# EAGLE board Pi4MotorShield (EAGLE 7.5.0)
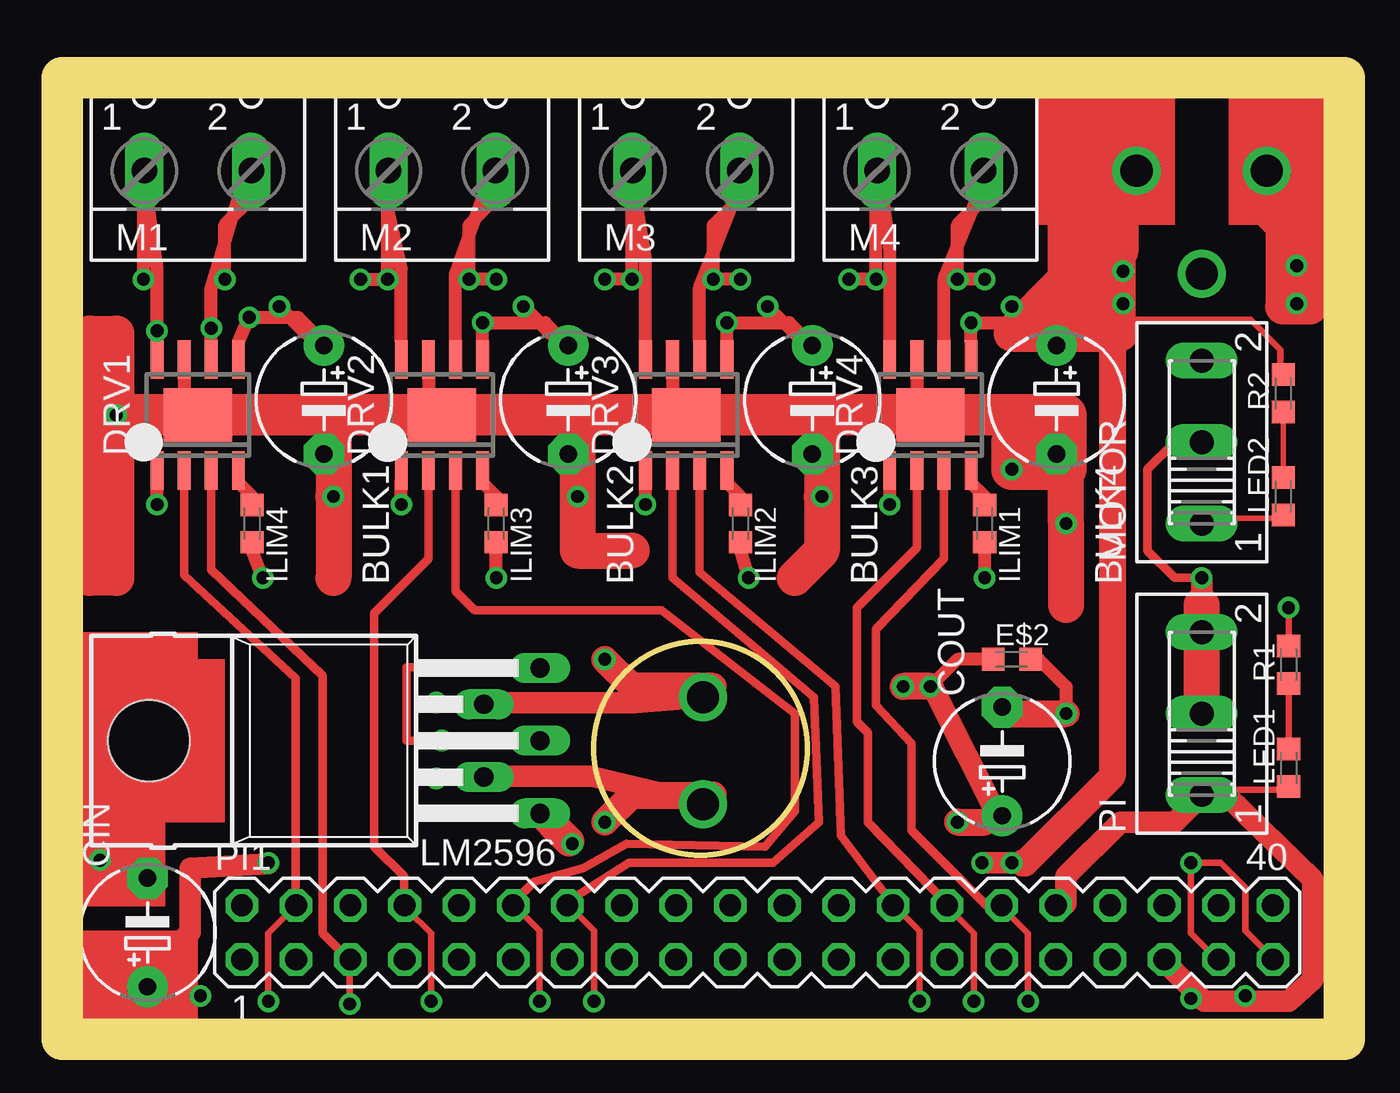
[diagram p0: board, top side]
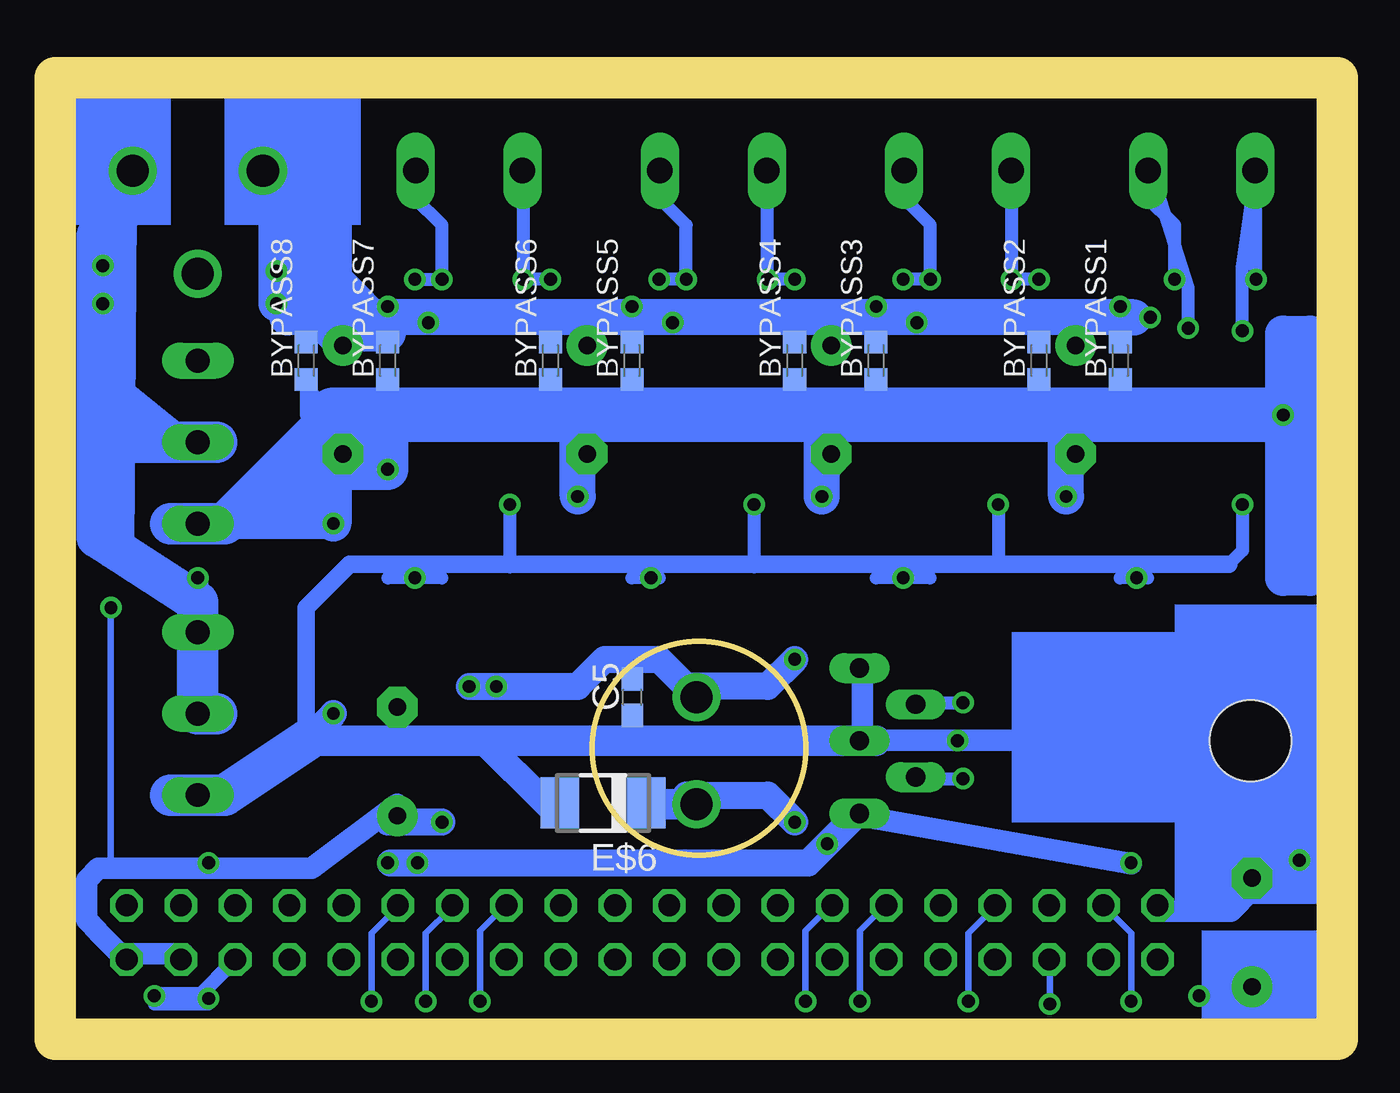
[diagram p1: board, bottom side, seen from below]

Size 60 x 45 mm. Coordinates in mm from the lower left corner, seen from the top.
Outline: 0,0 60,0 60,45 0,45 0,0
Outline: circle at 29.87,13.62 radius 5
Copper layers (1*16): Top 0.035mm / dielectric 1.5mm / Bottom 0.035mm
Design rules "default": minimum track width 10mil, minimum drill 24mil, track to track 8mil, track to pad 8mil, pad to pad 8mil, via to via 8mil, smd to smd 8mil, copper to edge 40mil, drill to drill 8mil, minimum pad ring 10mil, minimum via ring 8mil, stop-mask expansion 4mil, vias tented up to drill 0mil, thermal gap 10mil

## Footprints (pad centres in the part's own frame; a part is rotated, then mirrored left to right if it is on the bottom)
E5-6 = drill 0.813 pad 1.905: + -2.54,0 | drill 0.813 pad 1.905 octagon: - 2.54,0
C0603K = smd 1.05 x 1.08: 1 -0.875,0; 2 0.875,0
C0603 = smd 1.1 x 1: 1 -0.85,0; 2 0.85,0
HSOP8 = smd 0.6 x 1.8: 1 -1.905,-2.6; 2 -0.635,-2.6; 3 0.635,-2.6; 4 1.905,-2.6; 5 1.905,2.6; 6 0.635,2.6; 7 -0.635,2.6; 8 -1.905,2.6 | smd 3.2 x 2.51: EXP 0,0
DO-214AC = smd 1.8 x 2.4: A 2.025,0; C -2.025,0
TO220-52 = drill 0.9 long: 1 -3.4,-21.1; 2 -1.7,-18.47; 3 0,-21.1; 4 1.7,-18.47; 5 3.4,-21.1 | hole 3.8: 0,-2.8
W237-102 = drill 1.194 long: 1 -2.5,-1.27; 2 2.5,-1.27
255SB = drill 1.118 long: 1 -3.81,0; 2 0,0; 3 3.81,0
MA20-2 = drill 1.016 octagon: 1 -24.13,-1.27; 2 -24.13,1.27; 3 -21.59,-1.27; 4 -21.59,1.27; 5 -19.05,-1.27; 6 -19.05,1.27; 7 -16.51,-1.27; 8 -16.51,1.27; 9 -13.97,-1.27; 10 -13.97,1.27; 11 -11.43,-1.27; 12 -11.43,1.27; 13 -8.89,-1.27; 14 -8.89,1.27; 15 -6.35,-1.27; 16 -6.35,1.27; 17 -3.81,-1.27; 18 -3.81,1.27; 19 -1.27,-1.27; 20 -1.27,1.27; 21 1.27,-1.27; 22 1.27,1.27; 23 3.81,-1.27; 24 3.81,1.27; 25 6.35,-1.27; 26 6.35,1.27; 27 8.89,-1.27; 28 8.89,1.27; 29 11.43,-1.27; 30 11.43,1.27; 31 13.97,-1.27; 32 13.97,1.27; 33 16.51,-1.27; 34 16.51,1.27; 35 19.05,-1.27; 36 19.05,1.27; 37 21.59,-1.27; 38 21.59,1.27; 39 24.13,-1.27; 40 24.13,1.27

## Placement (x,y rotation side)
BULK1  470uF  [E5-6]  12.26,29.93 270 top
BULK2  470uF  [E5-6]  23.69,29.93 270 top
BULK3  470uF  [E5-6]  35.12,29.93 270 top
BULK4  470uF  [E5-6]  46.55,29.93 270 top
BYPASS1  .1uF  [C0603K]  10.16,31.75 90 bottom
BYPASS2  .1uF  [C0603K]  13.97,31.75 90 bottom
BYPASS3  .1uF  [C0603K]  21.59,31.75 90 bottom
BYPASS4  .1uF  [C0603K]  25.4,31.75 90 bottom
BYPASS5  .1uF  [C0603K]  33.02,31.75 90 bottom
BYPASS6  .1uF  [C0603K]  36.83,31.75 90 bottom
BYPASS7  .1uF  [C0603K]  44.45,31.75 90 bottom
BYPASS8  .1uF  [C0603K]  48.26,31.75 90 bottom
C5  [C0603]  33,16 90 bottom
CIN  470uF  [E5-6]  4,5 90 top
COUT  220uF  [E5-6]  44,13 90 top
DRV1  [HSOP8]  6.35,29.21 0 top
DRV2  [HSOP8]  17.78,29.21 0 top
DRV3  [HSOP8]  29.21,29.21 0 top
DRV4  [HSOP8]  40.64,29.21 0 top
E$2  [C0603K]  44.45,17.78 0 top
E$6  [DO-214AC]  34.37,11.06 180 bottom
ILIM1  [C0603K]  43.18,24.13 270 top
ILIM2  [C0603K]  31.75,24.13 270 top
ILIM3  [C0603K]  20.32,24.13 270 top
ILIM4  [C0603K]  8.89,24.13 270 top
LED1  [C0603K]  57.4,12.7 90 top
LED2  [C0603K]  57.15,25.4 90 top
LM2596  [TO220-52]  1.27,13.97 90 top
M1  [W237-102]  6.35,41.91 0 top
M2  [W237-102]  17.78,41.91 0 top
M3  [W237-102]  29.21,41.91 0 top
M4  [W237-102]  40.64,41.91 0 top
MOTOR  [255SB]  53.34,27.94 90 top
PI  [255SB]  53.34,15.24 90 top
PI1  [MA20-2]  32.54,5 0 top
R1  [C0603K]  57.4,17.53 90 top
R2  [C0603K]  57.15,30.23 90 top

## Library data of the parts
BULK1-BULK4 CIN COUT = rcl
BYPASS1-BYPASS8 E$2 ILIM1-ILIM4 = ref-packages
C5 = eagle-ltspice
DRV1-DRV4 = st-microelectronics
E$6 = diode
LED1 LED2 R1 R2 = ref-packages-longpad
LM2596 = linear
M1-M4 = con-wago-500
MOTOR PI = switch
PI1 = con-lstb

## Nets
S$7: PI.2
S$64: PI.1

## Tracks (layer width: path | path; a pad name or v marks a point on that pad's centre or on a via)
S$1
  Top 0.305: 57.02,31.24 57.02,32.26 55.63,33.66 49.66,33.66
S$2
  Top 0.254: 57.15,29.34 57.15,26.29
S$3
  Top 0.254: 57.02,24.38 54.48,24.38
S$4
  Top 1.27: 49.15,32.51 49.15,12.32 45.09,8.26 44.96,8.26
S$5
  Top 0.254: 57.4,16.64 57.4,16.38 | 57.4,13.84 57.4,13.59
  Top 0.305: 57.4,13.84 57.4,16.38
S$6
  Top 0.254: 57.28,11.68 54.74,11.68
  Top 0.305: 54.36,11.68 57.28,11.68
S$7  (via drill 0.6, 1, 1.5)
  Top 0.406: 52.07,27.94 50.8,26.67 50.8,22.86 52.07,21.59 v53.34,21.59
  Top 1.016: v53.34,21.59 53.34,20.32
  Top 1.676: PI.2 53.34,20.32
  Bottom 1.016: 53.34,20.32 53.34,20.45 v53.34,21.59
  Bottom 1.676: PI.2 53.34,20.32
  Bottom 1.93: v56.39,40.64 56.39,39.24 58.04,37.59 58.04,30.73 | 58.04,30.73 54.74,28.07 | 58.04,30.73 58.04,23.5 53.34,20.45 PI.2 52.45,15.24
S$8
  Bottom 1.93: 52.45,27.94 53.34,27.94 54.74,27.94 56.77,27.94
S$9
  Bottom 1.93: 57.15,38.73 57.28,22.99
S$10  (via drill 0.6)
  Top 1.676: 12.7,29.21 v12.7,25.4 12.7,21.59 | 24.13,29.21 v24.13,25.4 24.13,22.86 26.67,22.86 | 35.56,29.21 v35.56,25.4 35.56,22.86 34.29,21.59 | 46.99,27.94 v46.99,24.13 46.99,20.32
  Top 1.93: v2.54,29.21 12.7,29.21 24.13,29.21 35.56,29.21 46.99,29.21 46.99,27.94 46.99,26.67 v44.45,26.67 44.45,27.94 45.72,27.94
  Bottom 0.61: 48.26,29.21 48.26,30.48 46.99,29.21 | 46.99,25.4 46.99,26.67
  Bottom 1.422: v46.99,24.13 48.26,24.13 | 49.53,24.13 50.8,24.13 | 52.07,24.13 50.8,24.13 | 50.8,24.13 46.99,27.94 46.99,26.67 49.53,24.13 | 49.53,24.13 48.26,24.13 | 48.26,24.13 46.99,25.4
  Bottom 1.676: 46.99,27.94 46.99,25.4 v46.99,24.13 | v24.13,25.4 24.13,27.94 | v35.56,25.4 35.56,27.94 | v12.7,25.4 12.7,27.94
  Bottom 1.93: 54.61,24.13 52.07,24.13 46.99,29.21 | 44.45,27.94 v44.45,26.67 46.99,26.67 45.72,27.94
  Bottom 2.54: 46.99,29.21 v2.54,29.21
S$11
  Top 0.406: 41.4,6.35 37.72,10.16 37.72,14.35 37.21,14.86 37.21,20.19 40.01,22.99 40.01,25.78
S$12  (via drill 0.6)
  Top 0.61: v44.45,34.29 45.72,33.02
  Top 1.422: 49.53,39.37 49.53,33.02
  Top 1.676: 49.53,40.64 49.53,36.83 45.72,33.02 | 45.72,33.02 49.53,33.02 48.26,34.29 | 45.72,33.02 44.45,33.02 46.99,35.56 46.99,39.37 50.8,43.18 50.8,41.91 48.26,39.37 48.26,36.83
S$13
  Bottom 1.016: 22.23,13.84 22.23,17.27
S$14  (via drill 1.5)
  other vias: 30,11
S$15
  Top 1.016: 40.67,16.64 44,10
S$16
  Top 1.016: 19.81,12.32 24.77,12.32 30.04,11.05
S$17
  Bottom 1.016: 44,14 44,16
S$18
  Top 1.016: 20.7,15.75 26.78,15.75 30.04,16
S$19
  Bottom 1.422: 31,11 32,11
S$20
  Bottom 1.27: 37,11 40,14
S$21
  Top 1.016: 4,3 6,5 6,8 9.65,8.22
S$22
  Bottom 1.016: 4,8 4,13 5,14 21,14
S$23
  Top 1.016: 4,8 4,13 5,14
S$24
  Bottom 1.016: 22.64,10.51 9.65,8.22
S$25
  Top 1.016: 51.56,3.68 53.47,1.78 57.4,1.78 58.55,2.79 58.55,7.49 54.48,11.43
S$26
  Bottom 1.016: 8,6 5,6 4,7
S$27
  Bottom 1.016: 54,4 57,4 58,5 58,5.04 58.55,5.59 58.55,7.45 58,8 48,8 44,11
S$28
  Top 0.61: 8.89,25.4 8.26,26.04
S$29  (via drill 0.6)
  Top 0.61: v15.88,25.02 15.88,26.16
S$30  (via drill 0.6)
  Top 0.61: v27.3,25.02 27.3,26.04
  Bottom 0.61: v27.3,25.02 27.3,22.1
S$31  (via drill 0.6)
  Top 0.61: v38.73,25.02 38.73,25.91
S$32
  Bottom 1.676: 50.8,41.91 50.8,43.18 46.99,39.37 46.99,35.56 44.45,33.02 46.99,33.02 48.26,34.29 48.26,35.56 | 48.26,39.37 48.26,35.56 | 48.26,35.56 46.99,34.29 46.99,38.1 49.53,40.64
S$33
  Top 0.61: 20.32,25.4 19.68,26.04
S$34
  Top 0.61: 31.75,25.27 31.75,25.4 31.11,26.04
S$35
  Top 0.61: 43.18,25.27 43.18,25.4 42.55,26.04
S$36  (via drill 0.6)
  Top 0.61: v32.13,21.59 31.75,22.86
S$37  (via drill 0.6)
  Top 0.61: v43.18,21.59 43.18,22.86
S$38  (via drill 0.6)
  Top 0.61: v20.32,21.59 20.32,22.86
S$39  (via drill 0.6)
  Top 0.61: v9.4,21.59 8.89,22.86
S$40
  Top 1.422: 23.73,9.27 23,10 23,10.02 22.61,10.41
S$41
  Bottom 0.61: 8.89,21.59 10.16,21.59
S$42  (via drill 0.6)
  Top 1.016: 43.18,8.26 v44.45,8.26
S$43  (via drill 0.6)
  other vias: 43.05,8.26
S$44  (via drill 0.6)
  other vias: 23.88,9.14
S$45
  Bottom 1.27: 44.32,8.26 24.77,8.26 22.48,10.54
S$46
  Top 0.305: 38.86,6.22 38.99,6.22 40.13,5.08 40.13,1.91
S$47  (via drill 1.5)
  Bottom 0.406: 31,17 v30,16
S$48
  Top 1.27: 44.45,15.24 46.99,15.24
S$49  (via drill 0.6)
  Top 1.27: v41.91,10.16 43.18,10.16
  Bottom 1.27: v41.91,10.16 44.45,10.16
S$50  (via drill 0.6)
  Top 1.27: v25.4,10.16 26.67,11.43 30.48,11.43
  Bottom 1.27: 30.48,11.43 26.67,11.43 v25.4,10.16
S$51  (via drill 0.6)
  Top 0.61: 43.18,17.78 41.91,17.78 v40.64,16.51
  Top 1.27: 30.48,16.51 26.67,16.51 v25.4,17.78 | v40.64,16.51 v39.37,16.51
  Bottom 1.27: v25.4,17.78 26.67,16.51 30.48,16.51 31.75,17.78 34.29,17.78 35.56,16.51 v40.64,16.51
S$52  (via drill 0.6)
  Top 0.406: 21.97,17.4 16.13,17.4 16.13,13.97 v17.78,13.97 22.86,13.97
S$53  (via drill 0.6)
  Top 0.61: v1.78,8.38 3.05,8.38 3.94,7.49
  Bottom 0.61: v1.78,8.38 3.05,8.38 3.94,7.49
S$54  (via drill 0.6)
  Top 0.61: v6.48,2.03 4.45,2.03 3.81,2.67
  Bottom 0.61: v6.48,2.03 4.45,2.03 3.94,2.54
S$55  (via drill 0.6)
  Top 0.61: 20.32,15.75 18.8,15.75 v17.53,15.75
  Bottom 0.61: 19.81,15.75 v17.53,15.75
S$56  (via drill 0.6)
  Top 0.61: 20.32,12.19 18.8,12.19 v17.53,12.19
  Bottom 0.61: 19.81,12.19 v17.53,12.19
S$57  (via drill 0.6)
  other vias: 57.78,34.42
S$58  (via drill 0.6)
  other vias: 57.78,36.2
S$59  (via drill 0.6)
  other vias: 49.66,35.94
S$60  (via drill 0.6)
  Bottom 1.676: v49.66,34.42 49.66,39.75 50.29,40.39
S$61
  Top 1.676: 57.91,34.54 57.91,37.59 56.39,39.12
S$62  (via drill 0.6)
  other vias: 9.65,8.26
S$63
  Top 0.406: 5.71,25.91 5.71,21.72 10.92,16.89 10.92,6.35
S$64
  Top 1.016: 46.99,6.35 46.99,7.62 49.53,10.16 52.07,10.16 PI.1
S$65
  Top 0.406: 41.27,26.29 41.27,22.48 38.1,19.18 38.1,15.62 39.75,13.84 39.75,9.78 43.56,5.97
S$66
  Top 0.406: 29.84,25.91 29.84,21.84 36.2,16.51 36.45,9.53 38.86,6.35
S$67
  Top 0.406: 24.13,6.35 24.13,6.73 26.54,8.26 33.27,8.26 35.43,10.16 35.18,16 28.57,21.59 28.57,25.78
S$68
  Top 0.305: 21.08,6.35 22.35,5.08 22.35,2.16
  Top 0.406: 21.08,6.35 22.1,7.37 24.38,8 26.42,9.14 32.89,9.02 34.29,10.67 34.29,15.24 28.07,20.07 19.3,20.07 18.41,20.95 18.41,25.91
S$69
  Top 0.406: 16,6.35 16,7.62 14.61,9.02 14.61,19.94 17.14,22.48 17.14,25.91
S$70  (via drill 0.6)
  Top 0.61: 4.45,32.77 v4.45,33.15 4.45,36.07 3.81,40.51
S$71  (via drill 0.6)
  Top 0.61: 6.99,32.64 v6.99,33.27 6.99,35.18 8.64,40.64
  Bottom 0.61: v6.99,33.27 6.99,35.18 8.76,40.77
S$72
  Top 0.61: 15.88,32.64 15.88,36.07 15.11,39.37
S$73
  Top 0.61: 18.41,32.64 18.41,35.81 19.81,39.75
S$74  (via drill 0.6)
  Top 0.305: 52.83,6.99 v52.83,8.26
S$75
  Top 0.406: 6.99,25.78 6.99,21.97 12.19,17.02
S$76
  Top 0.406: 13.34,3.81 12.19,4.95 12.19,17.02 11.94,17.27
S$77
  Top 0.61: 27.3,32.64 27.3,36.58 26.8,39.62
S$78
  Top 0.61: 29.84,32.64 29.84,35.18 31.5,39.37
S$79
  Top 0.61: 38.73,32.77 38.73,36.96 38.35,39.88
S$80
  Top 0.61: 41.27,32.77 41.27,35.56 43.05,39.88
S$81
  Top 0.61: 28.57,30.99 28.57,29.97
S$82
  Top 0.61: 40.01,30.99 40.01,29.97 40.13,29.84
S$83
  Top 0.61: 17.14,30.99 17.14,29.97
S$84
  Top 0.61: 5.71,30.99 5.71,30.1
S$85
  Bottom 1.27: 49.15,33.78 49.78,34.42
  Bottom 1.676: 9.53,33.78 49.15,33.78
S$86  (via drill 0.6)
  Top 0.61: 8.26,32.64 v8.76,33.78 11.05,33.78 12.32,32.51
S$87  (via drill 0.6)
  Top 0.61: 19.68,32.64 v19.68,33.53 22.61,33.53 23.62,32.51
S$88  (via drill 0.6)
  Top 0.61: 31.11,32.64 v31.11,33.53 34.04,33.53 35.05,32.51
S$89  (via drill 0.6)
  Top 0.61: v42.55,33.53 45.59,33.53 46.61,32.51
S$90
  Top 0.61: 42.55,32.64 42.55,33.66
S$91  (via drill 0.6)
  Top 0.61: v10.16,34.29 11.43,33.02
S$92
  Bottom 0.61: 9.02,33.66 9.78,33.66
S$93
  Bottom 0.61: 4.45,33.27 4.45,36.07 3.81,40.51
S$94  (via drill 0.6)
  Top 0.61: v21.59,34.29 22.86,33.02
S$95  (via drill 0.6)
  Top 0.61: 20.32,39.37 19.05,38.1 v19.05,35.56 v20.32,35.56
  Bottom 0.61: 20.32,39.37 19.05,38.1 v19.05,35.56 v20.32,35.56
S$96  (via drill 0.6)
  Top 0.61: v33.02,34.29 34.29,33.02
S$97  (via drill 0.6)
  Top 0.61: 31.75,39.37 30.48,38.1 v30.48,35.56 v31.75,35.56
  Bottom 0.61: 31.75,39.37 30.48,38.1 v30.48,35.56 v31.75,35.56
S$98  (via drill 0.6)
  Top 0.305: 57.4,18.54 57.4,18.67 v57.4,20.19
S$99
  Bottom 0.61: 19.05,21.59 21.59,21.59
S$100  (via drill 0.6)
  Top 0.61: 15.24,39.37 v15.24,35.56 v13.97,35.56
  Bottom 0.61: 15.24,39.37 v15.24,35.56 v13.97,35.56
S$101
  Bottom 0.61: 31.75,21.59 33.02,21.59
S$102  (via drill 0.6)
  Top 0.61: 26.67,39.37 v26.67,35.56 v25.4,35.56
  Bottom 0.61: 26.67,39.37 v26.67,35.56 v25.4,35.56
S$103
  Bottom 0.61: 41.91,21.59 44.45,21.59
S$104  (via drill 0.6)
  Top 0.61: 38.1,39.37 v38.1,35.56 v36.83,35.56
  Bottom 0.61: 38.1,39.37 v38.1,35.56 v36.83,35.56
S$105  (via drill 0.6)
  Top 0.61: 43.18,39.37 41.91,38.1 v41.91,35.56 v43.18,35.56
  Bottom 0.61: 43.18,39.37 41.91,38.1 v41.91,35.56 v43.18,35.56
S$106  (via drill 0.6)
  Top 0.61: v7.62,35.56 7.62,38.1 8.89,39.37
  Bottom 0.61: v7.62,35.56 7.62,38.1 8.89,39.37
S$107  (via drill 0.6)
  Top 0.61: v3.81,35.56 3.81,39.37
  Bottom 0.61: v3.81,35.56 3.81,39.37
S$108
  Bottom 0.61: 38.73,24.89 38.73,22.1
S$109  (via drill 0.6)
  Top 0.406: 4.45,25.91 4.45,25.78
  Top 0.61: 45.72,17.78 46.99,16.51 v46.99,15.24 | v4.45,25.02 4.45,25.78
  Bottom 0.61: v4.45,25.02 4.45,22.86 5.08,22.23 | 15.88,25.15 15.88,22.23
  Bottom 0.813: 48.26,13.97 48.26,20.19 46.23,22.23 15.88,22.23 5.08,22.23
  Bottom 1.27: v46.99,15.24 48.26,13.97
  Bottom 1.422: 48.26,13.97 21.59,13.97
  Bottom 1.93: 54.61,11.43 52.07,11.43 48.26,13.97
S$110
  Top 1.676: 2.54,33.02 2.54,21.59 1.27,21.59 1.27,33.02 2.54,33.02
  Bottom 1.676: 2.54,21.59 2.54,33.02 1.27,33.02 1.27,21.59 2.54,21.59
S$111
  Top 1.676: 58.42,41.91 58.42,44.45 55.88,44.45 55.88,39.37 57.15,38.1 57.15,34.29 58.42,34.29 58.42,41.91 | 58.42,41.91 57.15,43.18 57.15,39.37
S$112  (via drill 1.5)
  other vias: 53.34,35.81
S$113  (via drill 1.5)
  other vias: 50.29,40.64
S$114
  Bottom 0.305: 57.4,20.32 57.4,8.26 57.28,8.13
S$115
  Top 0.305: 41.4,6.22 42.67,4.95 42.67,1.91
S$116
  Top 0.305: 43.94,6.22 45.21,4.95 45.21,2.03
S$117
  Top 0.305: 52.83,6.86 52.83,4.95 53.85,3.94
S$118
  Top 0.305: 53.09,8.26 54.23,8.26 55.37,7.11 55.37,5.08 56.26,4.19
S$119
  Top 0.305: 24,5.84 24.13,5.84 24.89,5.08 24.89,2.16
S$120
  Top 0.305: 16.13,6.22 16.13,6.1 17.27,4.95 17.27,2.03
S$121
  Top 0.305: 13.46,3.68 13.46,1.78
S$122
  Top 0.305: 10.54,5.84 9.65,4.95 9.65,1.91
S$123  (via drill 0.6)
  other vias: 9.65,1.78
S$124  (via drill 0.6)
  other vias: 13.46,1.65
S$125  (via drill 0.6)
  other vias: 17.27,1.78
S$126  (via drill 0.6)
  other vias: 22.35,1.78
S$127  (via drill 0.6)
  other vias: 24.89,1.78
S$128  (via drill 0.6)
  other vias: 40.13,1.78
S$129  (via drill 0.6)
  other vias: 42.67,1.78
S$130  (via drill 0.6)
  other vias: 45.21,1.78
S$131
  Bottom 0.305: 45.21,2.03 45.21,4.95 43.94,6.22
S$132
  Bottom 0.305: 42.67,2.03 42.67,4.95 41.53,6.1
S$133
  Bottom 0.305: 40.13,1.91 40.13,5.08 38.99,6.22
S$134
  Bottom 0.305: 24.89,2.16 24.89,5.08 24,5.97
S$135
  Bottom 0.305: 22.35,2.16 22.35,5.08 21.21,6.22
S$136
  Bottom 0.305: 17.27,2.03 17.27,4.95 16.26,5.97
S$137
  Bottom 0.305: 13.46,1.78 13.46,3.68 13.34,3.81
S$138
  Bottom 0.305: 9.65,1.91 9.65,4.95 10.54,5.84
S$139  (via drill 0.6)
  Bottom 0.61: v52.83,1.91 52.83,2.41 51.56,3.68
S$140
  Bottom 0.61: 52.83,1.65 55.37,1.65
S$141  (via drill 0.6)
  other vias: 55.37,2.03
S$142
  Bottom 0.61: 55.37,2.16 53.21,2.16 51.82,3.56
(copper drawn outside any net)
  shapes: Bottom area x5, Top area x6